# Altium PCB Main.PcbDoc
Units mil, origin at the board's own origin, x right, y up, seen from the top; angles counter-clockwise.
Board outline 3975 x 2430 mil, 2 copper layers (Top Layer, Bottom Layer); 97 components, 109 nets, 364 pads, 146 vias.
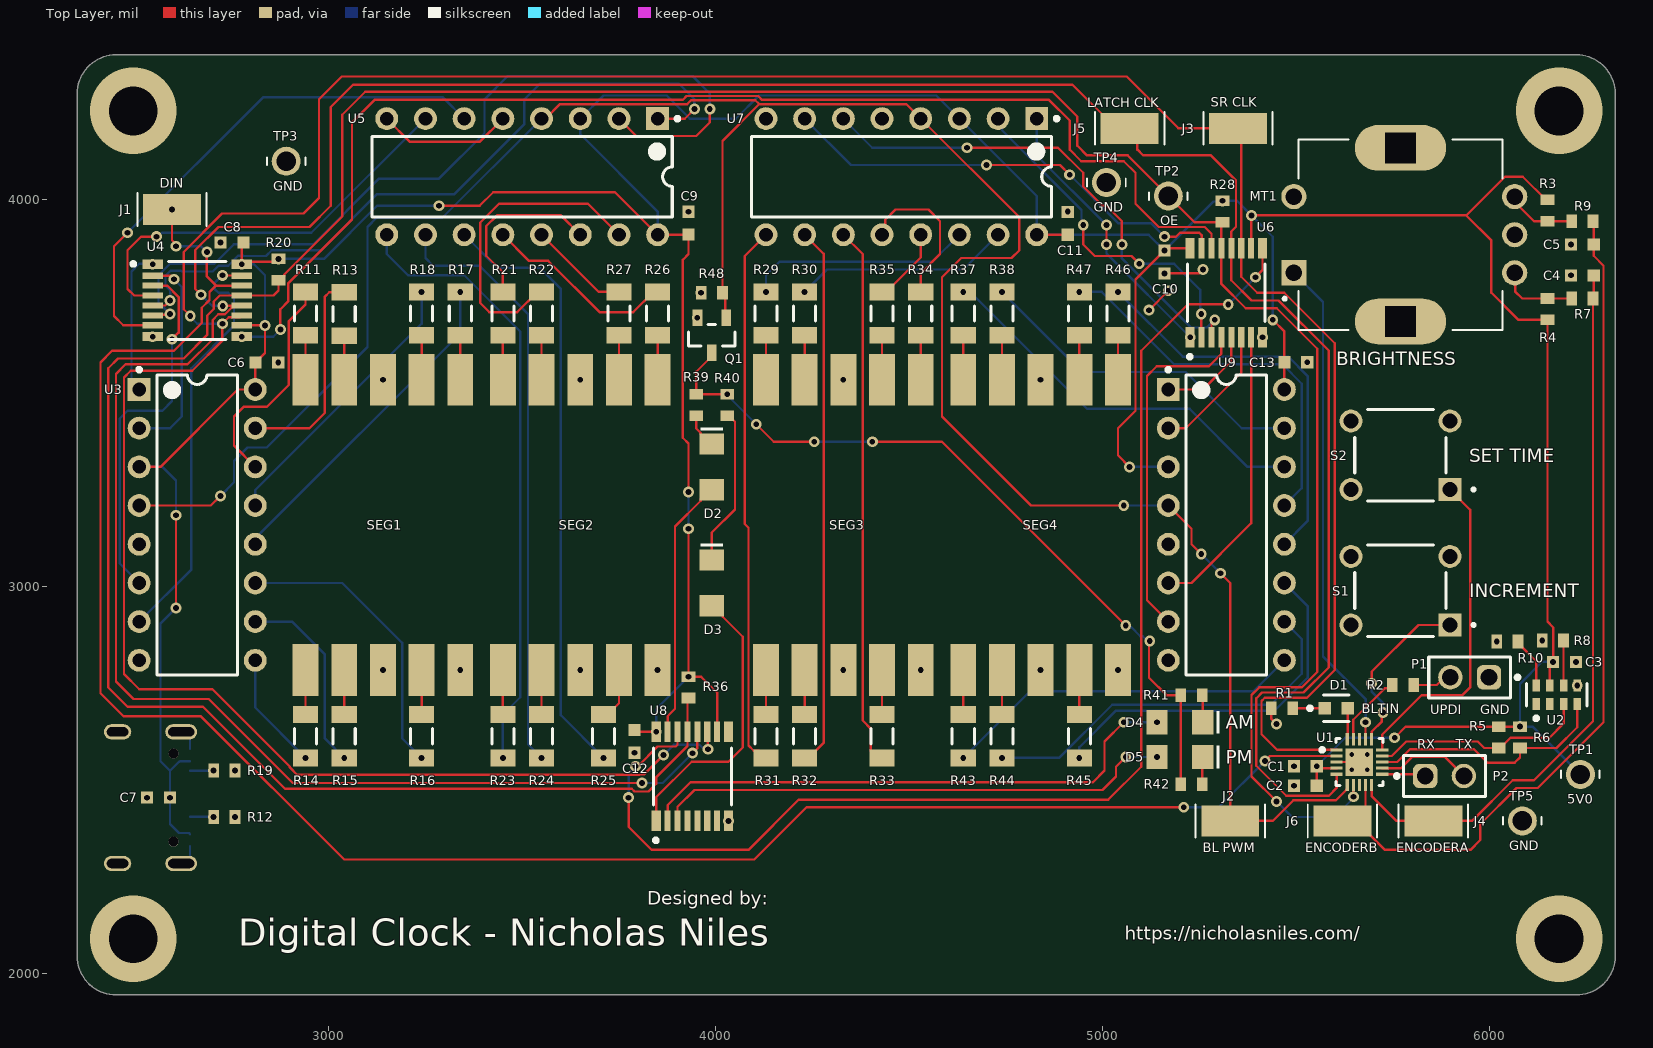
[diagram p0: Top Layer view]
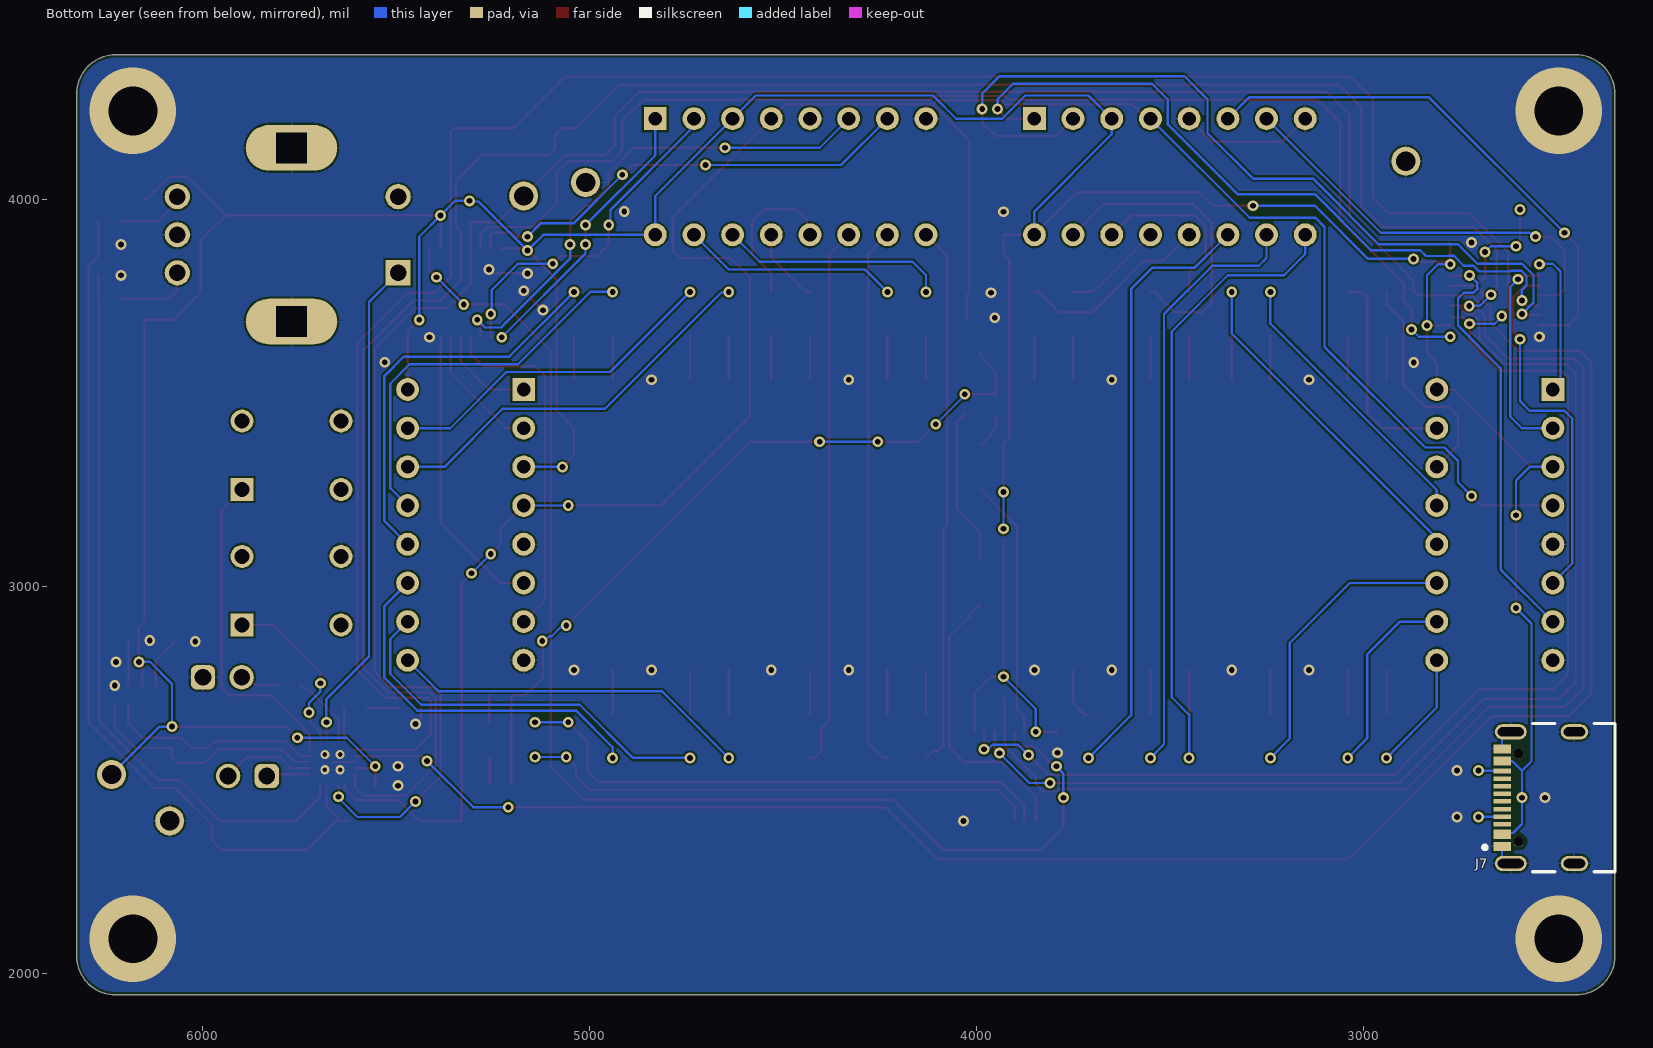
[diagram p1: Bottom Layer view, seen from below]

## Layer stack, top to bottom
Top Solder: solder mask 0.4, Solder Resist, Dk 3.5
Top Layer: signal copper 1.4
Dielectric 1: dielectric 12.6, FR-4, Dk 4.8
Bottom Layer: signal copper 1.4
Bottom Solder: solder mask 0.4, Solder Resist, Dk 3.5

## Board outline
2350,2045 2350,4275 cw(c2450,4275) 2450,4375 6225,4375 cw(c6225,4275) 6325,4275 6325,2045 cw(c6225,2045) 6225,1945 2450,1945 cw(c2450,2045)

## Design rules (kind name [scope] priority, off if disabled: settings)
BoardOutlineClearance [All] p1: gap=7.87 ignorepadtopadclearanceinfootprint=FALSE
Clearance [All] p1: gap=5 ignorepadtopadclearanceinfootprint=TRUE except(10: Arc-Hole Track-Hole SMDPad-Hole THPad-Hole Via-Hole Fill-Hole Poly-Hole Region-Hole Text-Hole)
ComponentClearance [All] p1: gap=5 collisioncheckmode=3 verticalgap=5 showdistances=TRUE
DiffPairsRouting [All] p1: maxlimit=10 minlimit=5 mostfreqgap=5 toplayer_minwidth=5 toplayer_maxwidth=1000 toplayer_prefwidth=5 bottomlayer_minwidth=5 bottomlayer_maxwidth=1000 bottomlayer_prefwidth=5 maxuncoupledlength=500
Height [All] p1: minheight=0 maxheight=71497.94 prefheight=500
HoleSize [All] p1: absolutevalues=TRUE maxlimit=248.03 minlimit=11.81 maxpercent=80.000 minpercent=20.000
HoleToHoleClearance [All] p1: gap=10 allowstackedmicrovias=FALSE
MinimumAnnularRing [All] p1: minimumring=6
MinimumSolderMaskSliver [All] p1: minsoldermaskwidth=6
PlaneClearance [All] p1: clearance=5
PlaneConnect PlaneConnectPowerPads [InPadClass('PowerPads')] p1: planeconnectstyle=Direct reliefexpansion=20 reliefentries=4 reliefconductorwidth=10 reliefairgap=10
PlaneConnect [All] p2: pad.planeconnectstyle=Relief pad.reliefexpansion=11.81 pad.reliefentries=4 pad.reliefconductorwidth=5 pad.reliefairgap=5 via.planeconnectstyle=Direct via.reliefexpansion=11.81 via.reliefentries=4 via.reliefconductorwidth=5 via.reliefairgap=5
PolygonConnect PolygonConnectPowerPads [All vs (InPadClass('PowerPads'))] p1: connectstyle=Direct reliefconductorwidth=10 reliefentries=4 polygonreliefangle="90 Angle" airgapwidth=10
PolygonConnect [All] p2: thpad.connectstyle=Relief thpad.reliefconductorwidth=5 thpad.reliefentries=4 thpad.polygonreliefangle="90 Angle" thpad.airgapwidth=5 smdpad.connectstyle=Relief smdpad.reliefconductorwidth=5 smdpad.reliefentries=4 smdpad.polygonreliefangle="90 Angle" smdpad.airgapwidth=5 via.connectstyle=Direct via.reliefconductorwidth=5 via.reliefentries=4 via.polygonreliefangle="90 Angle" via.airgapwidth=5
RoutingVias [All] p1: holewidth=11.81 width=23.62 viastyle="Through Hole" minholewidth=11.81 minwidth=23.62 maxholewidth=23.62 maxwidth=259.84
SilkToSilkClearance [All] p1: silktosilkclearance=5
SilkToSolderMaskClearance [IsPad] p1: minsilkscreentomaskgap=5 clearancetoexposedcopper=TRUE
SolderMaskExpansion [All] p1: expansion=2 istentingtop=FALSE
SupplyNets "Schematic Supply Nets_1" [InNet('5V0')] p1: voltage=0.000
SupplyNets "Schematic Supply Nets" [InNet('GND')] p2: voltage=0.000
UnRoutedNet [All] p1: checkbadconnections=TRUE
Width Width_10mil [All] p1: maxlimit=6 minlimit=6 preferedwidth=6 minimp=50.000000 maximp=50.000000 favimp=50.000000
Width Width_6mil [All] p2: maxlimit=1000 minlimit=6 preferedwidth=6 minimp=50.000000 maximp=50.000000 favimp=50.000000
Width Power_20mil [All] p3: maxlimit=1000 minlimit=20 preferedwidth=20 minimp=50.000000 maximp=50.000000 favimp=50.000000
Width Power_12mil [All] p4: maxlimit=1000 minlimit=12 preferedwidth=12 minimp=50.000000 maximp=50.000000 favimp=50.000000
Width Width_5mil [All] p5: maxlimit=1000 minlimit=5 preferedwidth=5 minimp=50.000000 maximp=50.000000 favimp=50.000000
19 further rules are at their usual default settings.

## Classes and differential pairs
component class Main: C1 C2 C3 C4 C5 C6 C9 C13 D1 D2 D3 D4 D5 J1 J2 J3 J4 J5 J6 J7 MT1 P1 P2 Q1 R1 R2 R3 R4 R5 R6 R7 R8 R9 R10 R13 R15 R17 R20 R21 R23 R24 R26 R27 R30 R32 R33 R35 R37 R38 R43 S1 S2 SEG1 SEG2 SEG3 SEG4 TP1 TP2 TP3 TP4 TP5 U1 U2 U3 U4 U5 U6 U7 U8 U9

## Components (designator, comment, footprint, x,y, rotation, side; value= is the part's Value field where it differs from the comment)
C1 "10uF" WCAP-CSGP_0603_L1.6W0.8H0.8_Reflow 5524,2536 r0 top
C2 "1uF" WCAP-CSGP_0603_L1.6W0.8H0.8_Reflow 5524,2486 r0 top
C3 "0.1µF" WCAP-CSGP_0603_L1.6W0.8H0.8_Reflow 6194,2806 r0 top
C4 "10nF" WCAP-CSGP_0603_L1.6W0.8H0.8_Reflow 6240,3805 r180 top
C5 "10nF" WCAP-CSGP_0603_L1.6W0.8H0.8_Reflow 6240,3885 r180 top
C6 "100nF" WCAP-CSGP_0603_L1.6W0.8H0.8_Reflow 2840,3580 r180 top locked
C7 "22uF" WCAP-CSGP_0603_L1.6W0.8H0.8_Reflow 2560,2455 r0 top
C8 "100nF" WCAP-CSGP_0603_L1.6W0.8H0.8_Reflow 2750,3890 r0 top locked
C9 "100nF" WCAP-CSGP_0603_L1.6W0.8H0.8_Reflow 3930,3940 r270 top locked
C10 "100nF" WCAP-CSGP_0603_L1.6W0.8H0.8_Reflow 5160,3839.53 r90 top locked
C11 "100nF" WCAP-CSGP_0603_L1.6W0.8H0.8_Reflow 4910,3939.53 r270 top locked
C12 "100nF" WCAP-CSGP_0603_L1.6W0.8H0.8_Reflow 3790,2600.47 r90 top locked
C13 "100nF" WCAP-CSGP_0603_L1.6W0.8H0.8_Reflow 5499.53,3580.47 r180 top
D1 "LTST-C190KGKT" FP-LTST-C190KGKT-MFG 5604,2686 r0 top
D2 "150120RS75000" WL-SMCW_1206_150120xx75000 3990,3310 r270 top locked
D3 "150120RS75000" WL-SMCW_1206_150120xx75000 3990,3010 r270 top locked
D4 "150120RS75000" WL-SMCW_1206_150120xx75000 5200,2650 r180 top locked
D5 "150120RS75000" WL-SMCW_1206_150120xx75000 5200,2560 r180 top locked
J1 "5019" 5019_MFG 2595,3975 r0 top
J2 "5019" 5019_MFG 5330,2395 r0 top
J3 "5019" 5019_MFG 5350,4185 r0 top
J4 "5019" 5019_MFG 5855,2395 r0 top
J5 "5019" 5019_MFG 5070,4185 r0 top
J6 "5019" 5019_MFG 5620,2395 r0 top
J7 "USB4105-GF-A" FP-USB4105-GF-A-MFG 2500,2455 r90 bottom
MT1 "PEC11R-4215F-S0024" XDCR_PEC11R-4215F-S0024 5770,3910 r90 top
P1 "61300211121" 61300211121 5949,2766 r180 top
P2 "61300211121" 61300211121 5884,2511 r0 top
Q1 "DMN2058U-13" FP-C04-17458-MFG 3990,3650 r270 top locked
R1 "1kΩ" RESC1608X55X25NL10T15 5464,2686 r0 top
R2 "1k" RESC1608X55X25NL10T15 5776.56,2746 r180 top
R3 "10k" RESC1608X55X25NL10T15 6150,3972.56 r90 top
R4 "10k" RESC1608X55X25NL10T15 6150,3717.44 r270 top
R5 "10k" RESC1608X55X25NL10T15 6024,2611 r90 top
R6 "10k" RESC1608X55X25NL10T15 6079,2611 r90 top
R7 "10k" RESC1608X55X25NL10T15 6240,3745 r0 top
R8 "10kΩ" RESC1608X55X25NL10T15 6163.88,2861 r0 top
R9 "10k" RESC1608X55X25NL10T15 6240,3945 r0 top
R10 "10kΩ" RESC1608X55X25NL10T15 6046.44,2858.44 r0 top
R11 "470Ω" RESC3216X70X50NL05T20 2940,3706.1 r90 top locked
R12 "5.1kΩ" RESC1608X55X25NL10T15 2730,2405 r180 top
R13 "470Ω" RESC3216X70X50NL05T20 3040,3705 r90 top
R14 "470Ω" RESC3216X70X50NL05T20 2940,2613.9 r270 top locked
R15 "470Ω" RESC3216X70X50NL05T20 3040,2613.9 r270 top locked
R16 "470Ω" RESC3216X70X50NL05T20 3240,2613.9 r270 top locked
R17 "470Ω" RESC3216X70X50NL05T20 3340,3706.1 r90 top locked
R18 "470Ω" RESC3216X70X50NL05T20 3240,3706.1 r90 top locked
R19 "5.1kΩ" RESC1608X55X25NL10T15 2730,2525 r180 top
R20 "10kΩ" RESC1608X55X25NL10T15 2870,3820 r270 top locked
R21 "470Ω" RESC3216X70X50NL05T20 3450,3706.1 r90 top locked
R22 "470Ω" RESC3216X70X50NL05T20 3550,3706.1 r90 top locked
R23 "470Ω" RESC3216X70X50NL05T20 3450,2613.9 r270 top locked
R24 "470Ω" RESC3216X70X50NL05T20 3550,2613.9 r270 top locked
R25 "470Ω" RESC3216X70X50NL05T20 3710,2613.9 r270 top locked
R26 "470Ω" RESC3216X70X50NL05T20 3850,3706.1 r90 top locked
R27 "470Ω" RESC3216X70X50NL05T20 3750,3706.1 r90 top locked
R28 "10kΩ" RESC1608X55X25NL10T15 5310,3970 r270 top locked
R29 "470Ω" RESC3216X70X50NL05T20 4130,3706.1 r90 top locked
R30 "470Ω" RESC3216X70X50NL05T20 4230,3706.1 r90 top locked
R31 "470Ω" RESC3216X70X50NL05T20 4130,2613.9 r270 top locked
R32 "470Ω" RESC3216X70X50NL05T20 4230,2613.9 r270 top locked
R33 "470Ω" RESC3216X70X50NL05T20 4430,2613.9 r270 top locked
R34 "470Ω" RESC3216X70X50NL05T20 4530,3706.1 r90 top locked
R35 "470Ω" RESC3216X70X50NL05T20 4430,3706.1 r90 top locked
R36 "10kΩ" RESC1608X55X25NL10T15 3930,2740 r270 top locked
R37 "470Ω" RESC3216X70X50NL05T20 4640,3706.1 r90 top locked
R38 "470Ω" RESC3216X70X50NL05T20 4740,3706.1 r90 top locked
R39 "1kΩ" RESC1608X55X25NL10T15 3950,3470 r270 top locked
R40 "1kΩ" RESC1608X55X25NL10T15 4030,3470 r270 top locked
R41 "1kΩ" RESC1608X55X25NL10T15 5230,2720 r0 top locked
R42 "1kΩ" RESC1608X55X25NL10T15 5230,2490 r0 top locked
R43 "470Ω" RESC3216X70X50NL05T20 4640,2613.9 r270 top locked
R44 "470Ω" RESC3216X70X50NL05T20 4740,2613.9 r270 top locked
R45 "470Ω" RESC3216X70X50NL05T20 4940,2613.9 r270 top locked
R46 "470Ω" RESC3216X70X50NL05T20 5040,3706.1 r90 top locked
R47 "470Ω" RESC3216X70X50NL05T20 4940,3706.1 r90 top locked
R48 "10kΩ" RESC1608X55X25NL10T15 3990,3760 r0 top locked
S1 "SWT0325-073016TSK_REVA" SW_SWT0325-073016TSK_REVA 5770,2990 r180 top
S2 "SWT0325-073016TSK_REVA" SW_SWT0325-073016TSK_REVA 5770,3340 r180 top
SEG1 "ACSC56-41SEKWA" ACSC56-41SEKWA 3140,3160 r0 top locked
SEG2 "ACSC56-41SEKWA" ACSC56-41SEKWA 3650,3160 r0 top locked
SEG3 "ACSC56-41SEKWA" ACSC56-41SEKWA 4330,3160 r0 top locked
SEG4 "ACSC56-41SEKWA" ACSC56-41SEKWA 4840,3160 r0 top locked
TP1 "1035" KEYSTONE_1035 6235,2515 r0 top
TP2 "1035" KEYSTONE_1035 5170,4010 r0 top
TP3 "1035" KEYSTONE_1035 2890,4100 r0 top
TP4 "1035" KEYSTONE_1035 5010,4045 r0 top
TP5 "1035" KEYSTONE_1035 6085,2395 r0 top
U1 "ATTINY1616-MFR" FP-C04-21380-MFG 5664,2546.94 r0 top
U2 "RV-3028-C7 32.768kHz 1ppm TA QC" FP-RV-3028-C7_32_768kHz_1-MFG 6174,2721 r0 top
U3 "CD74HCT4511E" N0016A 2660,3160 r0 top locked
U4 "74HC595PW,118" FP-SOT403-1-MFG 2660,3740 r0 top locked
U5 "CD74HCT4511E" N0016A 3500,4060 r270 top locked
U6 "74HC595PW,118" FP-SOT403-1-MFG 5320,3760 r90 top locked
U7 "CD74HCT4511E" N0016A 4480,4060 r270 top locked
U8 "74HC595PW,118" FP-SOT403-1-MFG 3940,2510 r90 top locked
U9 "CD74HCT4511E" N0016A 5320,3160 r0 top locked

## Footprints (in the part's own frame and the unit in brackets; to place one, negate y for a bottom-side part, rotate by r counter-clockwise, add the part's x,y. Pads: shape width x height; smd on the part's side, far side on the other; paste and mask are expansions set on the pad)
5019_MFG [mm] "Recommended Land Pattern"
  rect 3.8x2.03 smd paste+0 mask+0: 1(0,0)
  silkscreen extent -2.27,-1.08 2.27,1.08, body extent -1.91,-1.01 1.91,1.01, height 2.42
61300211121 [mm] "Pin Header, pitch 2.54 mm, THT, Vertical, single row, 2p"
  rrect50% 1.6x1.6 hole 1.1: 1(-1.27,0)
  round 1.6 hole 1.1: 2(1.27,0)
  silkscreen extent -3.26,-1.35 2.69,1.35, body extent -2.54,-1.27 2.54,1.27, height 8.57
ACSC56-41SEKWA [mm]
  rect 1.7x3.4 / inner round 0 / far side round 0 all layers, no hole: 1(-5.08,-9.525) 2(-2.54,-9.525) 3(0,-9.525) 4(2.54,-9.525) 5(5.08,-9.525) 6(5.08,9.525) 7(2.54,9.525) 8(0,9.525) 9(-2.54,9.525) 10(-5.08,9.525)
  body extent -6.2,-9.5 6.2,9.5, height 3.75
FP-C04-17458-MFG [mm]
  rect 1.1x0.65 smd paste+0 mask+0: 1(-1.15,0.95) 2(-1.15,-0.95) 3(1.15,0)
  silkscreen extent -0.7,-1.52 0.7,1.52, body extent -1.8,-1.62 1.8,1.62, height 0.25
FP-C04-21380-MFG [mm]
  rect 0.8x0.2 smd paste+0 mask+0: 1(-1.5,0.8) 2(-1.5,0.4) 3(-1.5,0) 4(-1.5,-0.4) 5(-1.5,-0.8) 11(1.5,-0.8) 12(1.5,-0.4) 13(1.5,0) 14(1.5,0.4) 15(1.5,0.8)
  rect 0.2x0.8 smd paste+0 mask+0: 6(-0.8,-1.5) 7(-0.4,-1.5) 8(0,-1.5) 9(0.4,-1.5) 10(0.8,-1.5) 16(0.8,1.5) 17(0.4,1.5) 18(0,1.5) 19(-0.4,1.5) 20(-0.8,1.5)
  rect 1.8x1.8 smd paste+0 mask+0: 21(0,0)
  silkscreen extent -2.57,-1.55 1.55,1.55, body extent -2,-2 2,2, height 0.25
FP-LTST-C190KGKT-MFG [mm]
  rect 0.8x0.8 smd paste+0 mask+0: 1(-0.75,0) 2(0.75,0)
  silkscreen extent -1.85,-0.87 0.85,0.87, body extent -1.25,-0.55 1.25,0.55, height 0.25
FP-RV-3028-C7_32_768kHz_1-MFG [mm]
  rect 0.5x0.8 smd paste+0 mask+0: 1(-1.35,-0.6) 2(-0.45,-0.6) 3(0.45,-0.6) 4(1.35,-0.6) 5(1.35,0.6) 6(0.45,0.6) 7(-0.45,0.6) 8(-1.35,0.6)
  silkscreen extent -1.97,-1.67 1.97,0.75, body extent -1.7,-1.1 1.7,1.1, height 0.25
FP-SOT403-1-MFG [mm]
  rect 1.35x0.6 smd paste-1000 mask+0: 1(-2.925,2.375) 8(-2.925,-2.375) 9(2.925,-2.375) 16(2.925,2.375)
  rect 1.35x0.4 smd paste-1000 mask+0: 2(-2.925,1.625) 3(-2.925,0.975) 4(-2.925,0.325) 5(-2.925,-0.325) 6(-2.925,-0.975) 7(-2.925,-1.625) 10(2.925,-1.625) 11(2.925,-0.975) 12(2.925,-0.325) 13(2.925,0.325) 14(2.925,0.975) 15(2.925,1.625)
  silkscreen extent -4.32,-2.55 1.88,2.55, body extent -3.72,-2.9 3.72,2.9, height 0.25
FP-USB4105-GF-A-MFG [mm]
  rrect100% 1x2.1 hole 1.7 slot 0.6 at 0 deg paste-2539.97 mask+0: 1(-4.32,3.015) 2(4.32,3.015)
  rrect100% 1x1.8 hole 1.4 slot 0.6 at 0 deg paste-2539.97 mask+0: 3(-4.32,-1.165) 4(4.32,-1.165)
  rect 0.6x1.15 smd paste+0 mask+0: A1-B12(-3.2,3.59) A4-B9(-2.4,3.59) B1-A12(3.2,3.59) B4-A9(2.4,3.59)
  rect 0.3x1.15 smd paste+0 mask+0: A5(-1.25,3.59) A6(-0.25,3.59) A7(0.25,3.59) A8(1.25,3.59) B5(1.75,3.59) B6(0.75,3.59) B7(-0.75,3.59) B8(-1.75,3.59)
  round 0.65 hole 0.65 unplated paste-2539.97 mask+0: ""(-2.89,2.515) ""(2.89,2.515)
  silkscreen extent -4.86,-3.84 4.86,4.84, body extent -4.79,-3.76 4.79,3.77, height 3.26
KEYSTONE_1035 [mil]
  round 75 hole 50: TP(0,0)
  silkscreen extent -50,-10 50,10, body extent -50,-12 50,8, height 220
N0016A [mm] "DIP, 16-Leads, Body 19.7x6.6mm, Pitch 2.54mm"
  rect 1.5x1.5 hole 0.9: 1(-3.81,8.89)
  round 1.5 hole 0.9: 2(-3.81,6.35) 3(-3.81,3.81) 4(-3.81,1.27) 5(-3.81,-1.27) 6(-3.81,-3.81) 7(-3.81,-6.35) 8(-3.81,-8.89) 9(3.81,-8.89) 10(3.81,-6.35) 11(3.81,-3.81) 12(3.81,-1.27) 13(3.81,1.27) 14(3.81,3.81) 15(3.81,6.35) 16(3.81,8.89)
  silkscreen extent -3.93,-9.85 2.65,10.31, body extent -3.95,-9.85 3.95,9.85, height 5.08
RESC1608X55X25NL10T15 [mm] "Chip Resistor, 2-Leads, Body 1.60x0.80mm, IPC Medium Density"
  rect 0.7x0.9 smd: 1(-0.7,0) 2(0.7,0)
  body extent -0.85,-0.45 0.85,0.45, height 0.55
RESC3216X70X50NL05T20 [mm] "Chip Resistor, 2-Leads, Body 3.20x1.60mm, IPC Medium Density"
  rect 1.1x1.65 smd: 1(-1.425,0) 2(1.425,0)
  silkscreen extent -0.5,-0.72 0.5,0.72, body extent -1.63,-0.82 1.62,0.82, height 0.7
SW_SWT0325-073016TSK_REVA [mm]
  rect 1.508x1.508 / inner round 1.508 / far side rect 1.508x1.508 hole 1 mask+0.102: 1(-3.25,2.25)
  round 1.508 hole 1 mask+0.102: 2(3.25,2.25) 3(-3.25,-2.25) 4(3.25,-2.25)
  silkscreen extent -4.9,-3 3,3, body extent -3.95,-3 3.95,3, height 7.3
WCAP-CSGP_0603_L1.6W0.8H0.8_Reflow [mm] "Ceramic Capacitors, body 1.6x0.8mm"
  rect 0.8x0.8 smd: 1(-0.75,0) 2(0.75,0)
  body extent -0.8,-0.4 0.8,0.4, height 0.8
WL-SMCW_1206_150120xx75000 [mm] "SMD Mono-color Chip LED, body 3.2x1.6mm"
  rect 1.4x1.6 smd: 1(-1.5,0) 2(1.5,0)
  silkscreen extent -2.6,-0.75 -2.4,0.75, body extent -1.6,-0.8 1.6,0.8, height 0.68
XDCR_PEC11R-4215F-S0024 [mm]
  rect 1.65x1.65 hole 1.1: 1(-2.5,7)
  round 1.65 hole 1.1: 2(2.5,7) A(-2.5,-7.5) B(2.5,-7.5) COM(0,-7.5)
  oval 3x6 hole 2 square: S1(-5.7,0) S2(5.7,0)
  silkscreen extent -6.25,-6.7 6.25,7.7, body extent -6.93,-7.6 6.93,7.1, height 21.53

## Part data
C1 C2 C3 C4 C5 C6 C7 C8 C9 C10 C11 C12 C13: library part CMP-207839-000060-3, "10V tolerance"
D1: library part CMP-2000-05197-2, "LED GREEN CLEAR CHIP SMD", Case Code (Imperial)=0603, Case Code (Metric)=1608, Color=Green, Forward Current=30mA, Forward Voltage=2V, Lens Color=Colorless, Max Operating Temperature=85°C, Min Operating Temperature=-55°C, Package Quantity=1, Power Dissipation=75mW, Reverse Voltage=5V, Test Current=20mA, Case/Package=0603, Depth=0.8mm, Dominant Wavelength=571nm, Height=0.8mm, Illumination Color=Green, Lead Free="Lead Free", Length=1.6mm, Lens Style=Diffused, Lens Transparency=Clear, Luminous Intensity=35mcd, Mount="Surface Mount", Number of Elements=1, Number of LEDs=1, Number of Pins=2, Packaging="Tape and Reel", Power Rating=75mW, Radiation Hardening=No, Viewing Angle=130°, Wavelength=574nm, Width=0.8mm
D2 D3 D4 D5: library part CMP-1426-00013-4, "WL-SMCW SMT Mono-Color Chip LED Waterclear", Case Code (Imperial)=1206, Case Code (Metric)=3216, Color=Red, Forward Current=100mA, Forward Voltage=2V, Max Junction Temperature (Tj)=95°C, Max Operating Temperature=85°C, Max Reverse Voltage (DC)=5V, Min Operating Temperature=-40°C, Power Dissipation=72mW, Test Current=20mA, Case/Package=1206, Dominant Wavelength=625nm, Height=680µm, Length=3.2mm, Lens Style="Clear, Rectangular", Luminous Intensity=150mcd, Mount="Surface Mount", Packaging="Tape and Reel", Peak Wavelength=630nm, REACH SVHC=Unknown, Reverse Voltage=5V, RoHS=Compliant, Viewing Angle=140°, Wavelength=625nm, Width=1.6mm
J1 J2 J3 J4 J5 J6: library part CMP-1672-00008-3, "Phosphor Bronze Contact Miniature Silver Plated Surface Mount Test Points", China RoHS=Compliant, ComponentLink1Description="Manufacturer's Website", ComponentLink1URL=http://www.keyelco.com/, ComponentLink2Description="Datasheet URL", ComponentLink2URL=https://www.keyelco.com/product-pdf.cfm?p=1357, Contact Material=Silver, Contact Plating=Silver, Height=2.42mm, HelpURL=https://www.keyelco.com/product-pdf.cfm?p=1357, Lead Free="Lead Free", Lifecycle Status=Production, Material=Bronze, Mount="Surface Mount", Number of Contacts=1, Number of Pins=1, Packaging="Tape and Reel", REACH SVHC=Yes, RoHS=Compliant, Termination=SMD/SMT
J7: library part CMP-245163-000001-1, "CONN RCPT USB2.0 TYPEC 5A", Current Rating=5/6.25/1.25/0.25A, Manufacturer=GCT, Package=0, Temperature="-40°C to +85°C", Temperature Range High=+85°C, Temperature Range Low=-40°C, Voltage Rating=20V, Automotive=No, Category=Conn, ComponentLink2Description=Datasheet, ComponentLink2URL=https://gct.co/files/drawings/usb4105.pdf, Conn Orientation="Right Angle", Contact Material=Gold,Nickel, Device Class L1=Connectors, Device Class L2="USB Connectors", Device Class L3=unset, Digikey Description="CONN RCPT USB2.0 TYPEC 5A", Height=3.46mm, Is Female=yes, Lead Free=Yes, Manufacturer Part Number=USB4105-GF-A, Number of Contacts=16, Octopart=https://octopart.com/usb4105-gf-a-gct-106627878, RoHS=TRUE, Usb Standard="USB 2.0"
MT1: "Incremental Encoder, 12 Mm, Contact Rating 10 Ma - 5 Vdc", Package=None, Availability=Unavailable, MP=PEC11R-4215F-S0024, Price=None
P1: library part CMP-1712-00002-7, "THT Vertical Pin Header WR-PHD, Pitch 2.54 mm, Single Row, 2 pins", Color=Black, Contact Resistance=20mΩ, Current Rating=3A, Max Operating Temperature=105°C, Min Operating Temperature=-40°C, Operating Supply Voltage=250V, Connector Type="Male Pin", Contact Gender=Male, Contact Material=Gold, Contact Mating Length=5.9944mm, Contact Plating=Gold, Gender=Male, Height=8.94mm, Housing Material=PBT, Lead Free="Lead Free", Lead Pitch=2.54mm, Mount="Through Hole", Number of Contacts=2, Number of Pins=2, Number of Positions=2, Number of Rows=1, Orientation=Vertical, Packaging=Bulk, Pitch=2.54mm, REACH SVHC=No, RoHS=Compliant, Termination="Through Hole", Voltage Rating=250V
P2: library part CMP-1712-00002-6, Color=Black, Contact Resistance=20mΩ, Current Rating=3A, Max Operating Temperature=125°C, Min Operating Temperature=-40°C, Operating Supply Voltage=250V, Connector Type="Male Pin", Contact Gender=Male, Contact Material=Copper, Contact Mating Length=5.9944mm, Contact Plating=Gold, Gender=Male, Height=8.94mm, Housing Material=PBT, Lead Free="Lead Free", Lead Pitch=2.54mm, Mount="Through Hole", NexarPartId=20081794, Number of Contacts=2, Number of Pins=2, Number of Positions=2, Number of Rows=1, Orientation=Vertical, Packaging=Bulk, Pitch=2.54mm, REACH SVHC="No SVHC", RoHS=Compliant, Termination="Through Hole", Voltage Rating=250V
Q1: library part CMP-00252-47153607-1, "TN2130K1-G Mosfet, N-Channel Enhancement-Mode, 300V, 25 Ohm Rohs Compliant: Yes", Case/Package=SOT-23, Continuous Drain Current (ID)=85mA, Drain to Source Breakdown Voltage=300V, Drain to Source Resistance=25Ω, Gate to Source Voltage (Vgs)=20V, Input Capacitance=50pF, Max Operating Temperature=150°C, Max Power Dissipation=360mW, Min Operating Temperature=-55°C, Drain to Source Voltage (Vdss)=300V, Element Configuration=Single, Fall Time=7ns, Height=950µm, Lead Free="Lead Free", Length=2.9mm, Lifecycle Status=Production, Mount="Surface Mount", NexarPartId=47153607, Number of Channels=1, Number of Elements=1, Number of Pins=3, Power Dissipation=360mW, Radiation Hardening=No, Rds On Max=25Ω, Rise Time=7ns, RoHS=Compliant, Schedule B="8541210080, 8541210080", Turn-Off Delay Time=12ns, Turn-On Delay Time=10ns, Weight=1.437803g, Width=1.3mm
R1 R2 R3 R4 R5 R6 R7 R8 R9 R10 R12 R19 R20 R28 R36 R39 R40 R41 R42 R48: library part CMP-2000-04186-1
R11 R13 R14 R15 R16 R17 R18 R21 R22 R23 R24 R25 R26 R27 R29 R30 R31 R32 R33 R34 R35 R37 R38 R43 R44 R45 R46 R47: library part CMP-2003-00307-1, Manufacturer=Panasonic, Part Number=ERJ8ENF3300V
S1 S2: "6mm x 6mm Through Hole Tactile Switch", Package=None, Check_prices=https://www.snapeda.com/parts/SWT0325-073016TSK/Global+Connector+Technology/view-part/?ref=eda, MF="Global Connector Technology", MP=SWT0325-073016TSK, SnapEDA_Link=https://www.snapeda.com/parts/SWT0325-073016TSK/Global+Connector+Technology/view-part/?ref=snap
SEG1 SEG2 SEG3 SEG4: "SMD 7-Segment Display"
TP1 TP2 TP3 TP4 TP5: "Test Point PC Slotted THM Height .335 Brass/Tin", Package=None, Check_prices=https://www.snapeda.com/parts/1035/Keystone/view-part/?ref=eda, MF="Keystone Electronics", MP=1035, SnapEDA_Link=https://www.snapeda.com/parts/1035/Keystone/view-part/?ref=snap
U1: library part CMP-06276-000228-1, "IC MCU 8BIT 16KB FLASH 20VQFN", Case/Package=VQFN, Frequency=20MHz, Max Operating Temperature=125°C, Min Operating Temperature=-40°C, Core Architecture=AVR, Interface=I2C, Memory Size=16KB, Memory Type=FLASH, Number of I/Os=18, Oscillator Type=Internal, Packaging="Cut Tape", Peripherals="Brown-out Detect/Reset", RoHS Compliant=Yes
U2: library part CMP-226158-000001-1, "Real Time Clock Serial 2byte Clock/Calendar/Alarm/Timer/Battery Backup 8-Pin CSMD T/R", Ambient Temperature Range High=+85°C, Ambient Temperature Range Low=-40°C, Frequency=32.768kHz, Manufacturer="Micro Crystal", Max Supply Voltage=5.5V, Min Supply Voltage=1.1V, Nominal Supply Current=0.04uA, Temperature="-40°C to +85°C", Automotive=No, Category=IC, ComponentLink2Description=Datasheet, ComponentLink2URL=https://www.microcrystal.com/fileadmin/Media/Products/RTC/Datasheet/RV-3028-C7.pdf, Device Class L1="Integrated Circuits (ICs)", Device Class L2="Clock and Timing", Device Class L3="Real Time Clocks", Height=0.8mm, Interface=I2C, Lead Free=Yes, Manufacturer Part Number="RV-3028-C7 32.768kHz 1ppm TA QC", Memory Size=2Bytes, Mouser Description="RV-3028-C7 32.768KHZ 1PPM Ta Qc", Number Of Outputs=1, Octopart=https://octopart.com/rv-3028-c7+32.768khz+1ppm+ta+qc-micro+crystal-98880451, Package="RV-3028-C7 32.768kHz 1ppm TA QC", RoHS=TRUE, Temperature Range High=+85°C, Temperature Range Low=-40°C
U3 U5 U7 U9: library part CMP-0388-00318-2, "High Speed CMOS Logic BCD-to-7-Segment Latch / Decoder / Driver, 4.5 to 5.5 V, -55 to 125 degC, 16-pin DIP (N16), Pb-Free (RoHS)", Manufacturer="Texas Instruments", Rating=Catalog, Code_JEDEC=MS-001, ComponentLink1Description="Manufacturer URL", ComponentLink1URL=http://www.ti.com/, ComponentLink2Description=Datasheet, ComponentLink2URL=http://www.ti.com/general/docs/lit/getliterature.tsp?genericPartNumber=CD74HCT4511&fileType=pdf, ComponentLink3Description="Package Specification", ComponentLink3URL=http://www.ti.com/litv/pdf/mpdi002c, DatasheetVersion=SCHS279D, Eco-Plan="Pb-Free (RoHS)", Mounting Technology="Through Hole", PackageDescription="16-Pin Plastic In-Line, Body 19.305 x 6.35 mm, Pitch 2.54 mm", PackageReference=N0016A, PackageVersion=4040049/E, PartNumber=CD74HCT4511E, SubFamily="Discrete Segment LED Driver", Vin(Max)(V)=5.5, Vin(Min)(V)=4.5
U4 U6 U8: library part CMP-14351-000004-1, "IC SHIFT REGISTER 8BIT 16TSSOP"

## Via types
v1: diameter 28, hole 15, Top Layer to Bottom Layer, tented both sides, 138 vias
v2: diameter 223.62/223.62 (per signal layer), hole 125.98, Top Layer to Bottom Layer, 4 vias
v3: diameter 23.62, hole 11.81, Top Layer to Bottom Layer, 4 vias

## Nets (pads, with @x,y where several pads share a name; then routed paths per layer and width w, separated by ;. In a path a pad name is that pad's centre, name@x,y a point inside that pad or via, vN(x,y) a via of type N, cw(c..) or ccw(c..) an arc to the next point about the centre after c; other vN are vias at no path point)
5V0: C1.2 C2.2 C3.1 C6.2 C7.2 C8.2 C9.2 C10.2 C11.2 C12.2 C13.2 J7.A4-B9 J7.B4-A9 R3.2 R4.2 R5.2 R6.2 R20.1 R28.1 R36.1 TP1.TP U1.4 U2.7 U3.3 U3.16 U4.10 U4.16 U5.3 U5.16 U6.10 U6.16 U7.3 U7.16 U8.10 U8.16 U9.3 U9.16 | length 12098.8
  Top Layer w6: U3.3 2565,3310 2765,3510 U3.16 2810,3579.53 C6.2 2835,3604.53 v1(2835,3675) 2833.98,3676.02 U4.10 ; v1(2605,2945) v1(2605,3185) ; C8.2 2775.16,3885.63 v1(2775.16,3833.5) 2781.65,3840 2862.44,3840 v1(2870,3847.56) ; v1(3285,3985) 3390,3985 3425,4020 3740,4020 U5.16 3929.53,3910 3930,3909.53 3930,3860 3915,3845 3915,3385.48 3930,3370.48 v1(3930,3245) ; C12.2 3794.84,2625.16 v1(3846.5,2625.16) ; v1(3930,3150) v1(3930,2767.56) 3962.44,2767.56 4003.98,2726.02 U8.10 ; U7.16 C11.2 ; v1(5070,3310) 5040,3340 5040,3410 5085,3455 5085,3794.06 v1(5160,3869.06) 5166.1,3875.16 U6.16 ; U6.10 5384.49,3875.67 5384.49,3959.49 v1(5385,3960) 5940,3960 ; v1(5440,3690) 5470,3660 C13.2 U9.16 ; C2.2 v1(5553.53,2536) 5558.33,2531.2 U1.4 ; v1(5755,2610) 5783.56,2638.56 R5.2 v1(6079,2638.56) ; R3.2 6146.06,4000.12 6086.18,4060 6040,4060 5940,3960 ; U2.7 6156.28,2797.81 6165,2806.53 6165,2895 6150,2910 R4.2 6075.12,3689.88 6005,3760 6005,3895 5940,3960
  Bottom Layer w6: U3.3 2570,3310 2605,3275 v1(2605,3185) ; v1(2605,2945) 2565,2905 2565,2549.05 2589.53,2524.53 ; J7.A4-B9 2638.41,2363.44 2613.22,2363.44 2589.53,2387.12 v1(2589.53,2455) 2589.53,2524.53 ; J7.B4-A9 2616.14,2549.49 cw(c2599.02,2568.78) 2610.87,2545.87 2589.53,2524.53 ; v1(2775.16,3833.5) 2806.5,3833.5 2835,3805 v1(2835,3675) ; v1(2870,3847.56) 2987.56,3847.56 3125,3985 v1(3285,3985) ; v1(3846.5,2625.16) 3846.5,2684.06 v1(3930,2767.56) ; U5.16 3850,3970 3650,4170 U5.3 3710,4270 3873.41,4270 3933.41,4210 4051.7,4210 4111.7,4270 4570,4270 U7.3 4830,4010 U7.16 5119.06,3910 v1(5160,3869.06) 5287,3996.06 5308.5,3996.06 v1(5310,3997.56) 5347.44,3997.56 v1(5385,3960) 5440,3905 v1(5440,3690) ; v1(3930,3150) v1(3930,3245) ; v1(5070,3310) U9.3 ; v1(5553.53,2536) 5627.53,2610 v1(5755,2610) ; v1(6164.47,2806) 6136,2806 6079,2749 v1(6079,2638.56) 6111.44,2638.56 TP1.TP
AMIndicator: D4.2 U8.2 | length 1438.7
  Top Layer w6: U8.2 3876.02,2436.02 3935,2495 4975,2495 5005,2525 5005,2600 v1(5055,2650)
  Bottom Layer w6: v1(5055,2650) v1(5140.94,2650)
BL_PWM: J2.1 Q1.1 R48.2 U1.6 U3.4 U5.4 U7.4 U9.4 | length 6227.1
  Top Layer w6: U3.4 2695,3210 v1(2720,3235) ; U5.4 3560,4210 3597.53,4247.53 3926.41,4247.53 3936.33,4257.45 4102.61,4257.45 4112.53,4247.53 ; Q1.1 4024.72,3697.96 4024.72,3752.84 R48.2 4017.56,4152.56 4112.53,4247.53 ; v1(5055,3210) 4815,3210 4585,3440 4585,3800 4635,3850 4765,3850 4785,3870 4785,3955 U7.4 4492.47,4247.53 4112.53,4247.53 ; U9.4 5230,3150 5230,3110 v1(5255,3085) ; v1(5305,3035) 5330,3010 J2.1 5440,2395 5493.3,2448.3 5603.3,2448.3 5630.14,2475.14 5631.57,2475.14 5632.5,2476.08 U1.6
  Bottom Layer w6: v1(2720,3235) 2755,3270 2755,3325 2790,3360 2840,3360 3100,3620 3100,3930 3123.61,3953.61 3293.61,3953.61 U5.4 ; v1(5055,3210) U9.4 ; v1(5255,3085) v1(5305,3035)
BUILTIN: D1.2 U1.20 | length 80.4
  Top Layer w6: U1.20 5632.5,2617.81 5633.53,2618.83 D1.2
CenterDotLED1: D2.2 U8.15 | length 675.3
  Top Layer w6: U8.15 3876.02,2666.02 3895,2685 3895,3155.94 3961.5,3222.45 3961.5,3226.39 3986.06,3250.94 D2.2
CenterDotLED2: D3.2 U8.1 | length 739.8
  Top Layer w6: U8.1 3846.5,2456.5 3938,2548 4033,2548 4070,2585 4070,2870.94 4018.5,2922.45 4018.5,2926.39 3993.94,2950.94 D3.2
CLK: J3.1 U1.1 U4.11 U6.11 U8.11 | length 8310.2
  Top Layer w6: v1(2642,3700) 2642,3700.53 2625,3717.53 2625,3865.56 2724.44,3965 2935,3965 2975,4005 2975,4260 3033.76,4318.76 5062.31,4318.76 5196.08,4185 J3.1 5358.39,4176.61 U6.11 5358.39,3801.61 5400,3760 5469.63,3760 5600,3629.63 5600,2785 5528.41,2713.41 5419.41,2713.41 5411,2705 5411,2619 5451.56,2578.44 U1.1 ; U4.11 2770.28,3696.74 2741.74,3696.74 v1(2725,3680) 2725,3636.62 2646.96,3558.58 2488.21,3558.58 2470.75,3541.12 2470.75,2774.25 2510,2735 2699.52,2735 2899.52,2535 2899.52,2532.83 2918.15,2514.2 3802.2,2514.2 3803.01,2515 3815,2515 v1(3865,2565) ; U8.11 3979.19,2624.35 3979.19,2580.81 v1(3980,2580)
  Bottom Layer w6: v1(2642,3700) 2642,3698 2660,3680 v1(2725,3680) ; v1(3865,2565) 3892,2592 3958,2592 3965.79,2584.21 3975.79,2584.21 v1(3980,2580)
DIN: J1.1 U1.2 U4.14 | length 5103
  Top Layer w6: v1(2595,3975) 2595,3895.95 2605,3885.95 v1(2605,3880) ; v1(2685,3865) 2685,3802.11 2708.72,3778.39 ; U4.14 2708.72,3778.39 ; v1(5210,2430) 4235,2430 4100,2295 3040,2295 2670,2665 2470,2665 2410,2725 2410,3580 2440,3610 2600,3610 2672,3682 2672,3720.97 2692,3740.97 2692,3761.66 2708.72,3778.39 ; v1(5420,2550) 5432.69,2562.69 U1.2
  Bottom Layer w6: v1(2605,3880) 2670,3880 v1(2685,3865) ; v1(5210,2430) 5300,2430 v1(5420,2550)
ENCODERA: C4.1 J4.1 R7.2 U1.10 | length 1887.1
  Top Layer w6: U1.10 5695.5,2459.5 5760,2395 J4.1 5955,2395 6060,2500 6115,2500 6267.56,2652.56 R7.2 6269.53,3746.97 C4.1
ENCODERB: C5.1 J6.1 R9.2 U1.9 | length 2281.3
  Top Layer w6: J6.1 5654.84,2395 5729.84,2320 5950.91,2320 5976.28,2345.38 5976.28,2386.28 6070,2480 6125,2480 6295,2650 6295,3830 6269.53,3855.47 C5.1 6269.53,3943.03 R9.2 ; J6.1@5642.79,2395 5679.75,2431.96 U1.9
EVI: R10.2 U2.8 | length 133.2
  Top Layer w6: R10.2 6074,2854.5 6120.85,2807.65 U2.8
GND: C1.1 C2.1 C3.2 C4.2 C5.2 C6.1 C7.1 C8.1 C9.1 C10.1 C11.1 C12.1 C13.1 J7.1 J7.2 J7.3 J7.4 J7.A1-B12 J7.B1-A12 MT1.2 MT1.COM MT1.S1 MT1.S2 P1.1 Q1.2 R1.1 R8.1 R10.1 R12.1 R19.1 R48.1 S1.4 S2.4 SEG1.3 SEG1.5 SEG1.8 SEG2.3 SEG2.5 SEG2.8 SEG3.3 SEG3.5 SEG3.8 SEG4.3 SEG4.5 SEG4.8 TP3.TP TP4.TP TP5.TP U1.3 U1.21 U2.5 U3.5 U3.8 U4.8 U5.5 U5.8 U6.8 U7.5 U7.8 U8.8 U9.5 U9.8 | length 745.6
  Top Layer w6: U5.8 3210,4150 3390,4150 U5.5 ; v1(5120,3715) v1(5170,3765) ; v1(5160,3810) 5250,3810 v1(5260,3820) ; R1.1 5436.44,2658.56 v1(5450,2645) ; U1.3 U1.21
  Bottom Layer w6: J7.1 2625.92,2284.92 2641.34,2300.34 J7.A1-B12 ; J7.2 2625.92,2625.08 2641.34,2609.66 J7.B1-A12
  other v1: 4033.5,2394.84 2757.56,2405 2530.47,2455 5494.47,2486 2757.56,2525 5494.47,2536 3790,2570.94 6227.15,2744.62 3140,2785 3340,2785 3650,2785 3850,2785 4330,2785 4530,2785 4840,2785 5040,2785 6223.53,2806 6018.88,2858.44 6136.32,2861 3140,3535 3650,3535 4330,3535 4840,3535 2869.53,3580 5529.06,3580.47 5413.5,3644.84 2544.84,3646.5 3952.6,3695.28 3962.44,3760 6210.47,3805 6210.47,3885 2720.47,3890 3930,3969.53 4910,3970
  other v2: 2495,2090 6180,2090 2495,4230 6180,4230
  other v3: 5644.31,2527.26 5683.69,2527.26 5644.31,2566.63 5683.69,2566.63
LATCH_CLK: J5.1 U1.5 U4.12 U6.12 U8.12 | length 8359.4
  Top Layer w6: v1(2670,3755) 2655,3770 2655,3870.23 2714.77,3930 2950,3930 3005,3985 3005,4240 3062.86,4297.86 4922.3,4297.86 5035.16,4185 J5.1 5090,4165 5090,4130 5105,4115 5280,4115 5345,4050 5345,3930.47 5332.8,3918.26 U6.12 5332.8,3792.2 5385,3740 5455,3740 5585,3610 5585,2792.15 5519.45,2726.6 5412.22,2726.6 5397.26,2711.64 5397.26,2537.74 5475,2460 5585,2460 5604.94,2479.94 U1.5 ; v1(2726.1,3726.1) 2726.65,3726.65 2754.8,3726.65 U4.12@2755.35,3726.1 ; U4.12 2756.46,3727.2 2751.58,3722.33 2749.63,3722.33 2731.55,3704.25 2714.58,3704.25 2700,3689.66 2700,3640 2635,3575 2475,3575 2450,3550 2450,2755 2495,2710 2690,2710 2907,2493 v1(3810,2493) ; v1(3940,2570) 3952.8,2582.8 U8.12
  Bottom Layer w6: v1(2670,3755) 2698.9,3726.1 v1(2726.1,3726.1) ; v1(3810,2493) 3863,2493 v1(3940,2570)
NetD1_1: D1.1 R1.2 | length 82.9
  Top Layer w6: R1.2 D1.1
NetD2_1: D2.1 R39.2 | length 92.3
  Top Layer w6: R39.2 3950,3409.06 3961.5,3397.55 3961.5,3393.61 3986.06,3369.06 D2.1
NetD3_1: D3.1 R40.2 | length 408.8
  Top Layer w6: D3.1 3990,3140 4050,3200 4050,3426.38 4033.94,3442.44 R40.2
NetD4_1: D4.1 R41.2 | length 70.6
  Top Layer w6: R41.2 5259.06,2718.5 D4.1
NetD5_1: D5.1 R42.2 | length 70.6
  Top Layer w6: R42.2 5257.56,2558.5 D5.1
NetJ7_A5: J7.A5 R12.2 | length 61.4
  Bottom Layer w6: J7.A5 2641.73,2405.39 2702.05,2405.39 v1(2702.44,2405)
NetJ7_B5: J7.B5 R19.2 | length 61.6
  Bottom Layer w6: J7.B5 2641.89,2524.45 2701.89,2524.45 v1(2702.44,2525)
NetMT1_A: MT1.A R4.1 R7.1 | length 202.2
  Top Layer w6: MT1.A 6066.39,3810.46 6066.39,3763.61 6085,3745 R4.1 R7.1
NetMT1_B: MT1.B R3.1 R9.1 | length 181.5
  Top Layer w6: MT1.B 6065.28,3994.72 6115,3945 R9.1
NetQ1_3: Q1.3 R39.1 R40.1 R41.1 R42.1 | length 1985.7
  Top Layer w6: Q1.3 3990,3595.87 3950,3555.87 R39.1 v1(4030,3497.56) ; v1(4105,3420) 4150,3375 v1(4255,3375) ; v1(4405,3375) 4585,3375 v1(5060,2900) ; v1(5122,2860) 5120,2858 5120,2765 5165,2720 R41.1 R42.1
  Bottom Layer w6: v1@4030,3495 v1(4105,3420) ; v1(4255,3375) v1(4405,3375) ; v1(5060,2900) 5064.21,2895.79 5074.21,2895.79 5097.62,2872.38 5103.66,2872.38 5116.05,2860 v1(5122,2860)
NetR2_2: R2.2 U1.19 | length 188.1
  Top Layer w6: U1.19 5648.25,2656.18 5729.74,2737.66 5740.66,2737.66 R2.2
NetR11_1: R11.1 SEG1.10 | length 115
  Top Layer w6: SEG1.10 R11.1
NetR11_2: R11.2 U3.14 | length 586.8
  Top Layer w6: U3.14 2755,3365 2755,3440 2780,3465 2840,3465 2897,3522 2897,3687 2940,3730 R11.2
NetR13_1: R13.1 SEG1.9 | length 113.9
  Top Layer w6: SEG1.9 R13.1
NetR13_2: R13.2 U3.15 | length 551.2
  Top Layer w6: U3.15 2950,3410 2990,3450 2990,3750 3001.1,3761.1 R13.2
NetR14_1: R14.1 SEG1.1 | length 115
  Top Layer w6: R14.1 SEG1.1
NetR14_2: R14.2 U3.9 | length 306.1
  Bottom Layer w6: U3.9 2810,2687.8 v1(2940,2557.8)
NetR15_1: R15.1 SEG1.2 | length 115
  Top Layer w6: R15.1 SEG1.2
NetR15_2: R15.2 U3.10 | length 503.1
  Bottom Layer w6: U3.10 2905,2910 2990,2825 2990,2607.8 v1(3040,2557.8)
NetR16_1: R16.1 SEG1.4 | length 115
  Top Layer w6: R16.1 SEG1.4
NetR16_2: R16.2 U3.11 | length 762.1
  Bottom Layer w6: U3.11 3035,3010 3190,2855 3190,2607.8 v1(3240,2557.8)
NetR17_1: R17.1 SEG1.6 | length 115
  Top Layer w6: SEG1.6 R17.1
NetR17_2: R17.2 U3.12 | length 871.7
  Bottom Layer w6: U3.12 2820.15,3120.15 2820.15,3134.51 2823.74,3138.1 2823.74,3138.74 3340,3655 v1(3340,3762.2)
NetR18_1: R18.1 SEG1.7 | length 115
  Top Layer w6: SEG1.7 R18.1
NetR18_2: R18.2 U3.13 | length 730.3
  Bottom Layer w6: U3.13 2810,3250 3240,3680 v1(3240,3762.2)
NetR21_1: R21.1 SEG2.10 | length 115
  Top Layer w6: SEG2.10 R21.1
NetR21_2: R21.2 U5.14 | length 462.7
  Top Layer w6: R21.2 3450,3813.19 3407.31,3855.88 3407.31,3932.31 3435,3960 3600,3960 U5.14
NetR22_1: R22.1 SEG2.9 | length 115
  Top Layer w6: SEG2.9 R22.1
NetR22_2: R22.2 U5.15 | length 809.5
  Top Layer w6: R22.2 3539.17,3762.2 3486.97,3710 3415,3710 3391.62,3733.38 3391.62,3941.62 3440,3990 3670,3990 U5.15
NetR23_1: R23.1 SEG2.1 | length 115
  Top Layer w6: R23.1 SEG2.1
NetR23_2: R23.2 U5.9 | length 1598.7
  Bottom Layer w6: U5.9 3150,3860 3205,3805 3350,3805 3495,3660 3495,2714.37 3450,2669.37 v1(3450,2557.8)
NetR24_1: R24.1 SEG2.2 | length 115
  Top Layer w6: R24.1 SEG2.2
NetR24_2: R24.2 U5.10 | length 1546.8
  Bottom Layer w6: U5.10 3250,3850 3270,3830 3390,3830 3515,3705 3515,2592.8 v1(3550,2557.8)
NetR25_1: R25.1 SEG2.4 | length 137.9
  Top Layer w6: R25.1 3720.83,2670 3750,2699.17 SEG2.4
NetR25_2: R25.2 U5.11 | length 1565.8
  Bottom Layer w6: U5.11 3435,3825 3545,3825 3600,3770 3600,2667.8 v1(3710,2557.8)
NetR26_1: R26.1 SEG2.6 | length 115
  Top Layer w6: SEG2.6 R26.1
NetR26_2: R26.2 U5.12 | length 504.5
  Top Layer w6: U5.12 3517.58,3842.42 3567.58,3842.42 3700,3710 3786.97,3710 3839.17,3762.2 R26.2
NetR27_1: R27.1 SEG2.7 | length 115
  Top Layer w6: SEG2.7 R27.1
NetR27_2: R27.2 U5.13 | length 261.2
  Top Layer w6: U5.13 3697.8,3762.2 R27.2
NetR29_1: R29.1 SEG3.10 | length 115
  Top Layer w6: SEG3.10 R29.1
NetR29_2: R29.2 U7.14 | length 586.3
  Bottom Layer w6: v1(4130,3762.2) 4130,3805 4165,3840 4560,3840 U7.14
NetR30_1: R30.1 SEG3.9 | length 115
  Top Layer w6: SEG3.9 R30.1
NetR30_2: R30.2 U7.15 | length 561.2
  Bottom Layer w6: v1(4230,3762.2) 4287.8,3820 4640,3820 U7.15
NetR31_1: R31.1 SEG3.1 | length 115
  Top Layer w6: R31.1 SEG3.1
NetR31_2: R31.2 U7.9 | length 1405.3
  Top Layer w6: R31.2 4111.35,2576.45 4098.55,2576.45 4085,2590 4085,3152.5 4075,3162.5 4075,3855 U7.9
NetR32_1: R32.1 SEG3.2 | length 115
  Top Layer w6: R32.1 SEG3.2
NetR32_2: R32.2 U7.10 | length 1399.2
  Top Layer w6: R32.2 4240.83,2557.8 4279.1,2596.07 4279.1,3860.9 U7.10
NetR33_1: R33.1 SEG3.4 | length 115
  Top Layer w6: R33.1 SEG3.4
NetR33_2: R33.2 U7.11 | length 1400
  Top Layer w6: U7.11 4380,3860 4380,2654.55 4400.52,2634.03 4400.52,2576.45 4419.17,2557.8 R33.2
NetR34_1: R34.1 SEG3.6 | length 115
  Top Layer w6: SEG3.6 R34.1
NetR34_2: R34.2 U7.12 | length 410.4
  Top Layer w6: U7.12 4438.53,3918.53 4438.53,3948.53 4465,3975 4550,3975 4580,3945 4580,3860 4530,3810 R34.2
NetR35_1: R35.1 SEG3.7 | length 115
  Top Layer w6: SEG3.7 R35.1
NetR35_2: R35.2 U7.13 | length 195.6
  Top Layer w6: R35.2 4440.83,3762.2 4530,3851.38 U7.13
NetR37_1: R37.1 SEG4.10 | length 115
  Top Layer w6: SEG4.10 R37.1
NetR37_2: R37.2 U9.14 | length 1017.3
  Bottom Layer w6: v1(4640,3762.2) 4641.37,3760.84 4659.16,3760.84 4960,3460 5225,3460 5375,3310 U9.14
NetR38_1: R38.1 SEG4.9 | length 115
  Top Layer w6: SEG4.9 R38.1
NetR38_2: R38.2 U9.15 | length 875.9
  Bottom Layer w6: v1(4740,3762.2) 4947.2,3555 5215,3555 5360,3410 U9.15
NetR43_1: R43.1 SEG4.1 | length 115
  Top Layer w6: R43.1 SEG4.1
NetR43_2: R43.2 U9.9 | length 934.5
  Bottom Layer w6: v1(4640,2557.8) 4812.2,2730 5390,2730 U9.9
NetR44_1: R44.1 SEG4.2 | length 115
  Top Layer w6: R44.1 SEG4.2
NetR44_2: R44.2 U9.10 | length 1018.6
  Bottom Layer w6: v1(4740,2557.8) 4887.8,2557.8 5025,2695 5435,2695 5515,2775 5515,2865 U9.10
NetR45_1: R45.1 SEG4.4 | length 115
  Top Layer w6: R45.1 SEG4.4
NetR45_2: R45.2 U9.11 | length 961.6
  Bottom Layer w6: v1(4940,2557.8) 4940,2585 5035,2680 5445,2680 5530,2765 5530,2950 U9.11
NetR46_1: R46.1 SEG4.6 | length 115
  Top Layer w6: SEG4.6 R46.1
NetR46_2: R46.2 U9.12 | length 1039.8
  Bottom Layer w6: v1(5040,3762.2) 5207.2,3595 5480,3595 5530,3545 5530,3170 U9.12
NetR47_1: R47.1 SEG4.7 | length 115
  Top Layer w6: SEG4.7 R47.1
NetR47_2: R47.2 U9.13 | length 1006.9
  Bottom Layer w6: v1(4940,3762.2) 4997.8,3762.2 5185,3575 5465,3575 5515,3525 5515,3255 U9.13
NetU4_9: U4.9 U6.14 | length 3244.6
  Top Layer w6: v1(2875,3665) 2875,3717.62 2895.72,3738.33 2895.72,3785 3060,3949.28 3060,4200 3118.53,4258.53 3915,4258.53 3924.92,4268.45 4110.08,4268.45 4120,4258.53 4861.47,4258.53 4915,4205 4915,4130 4945,4100 5055,4100 5085,4070 5085,3990 5145,3930 5263.96,3930 5281.61,3912.35 U6.14
  Bottom Layer w6: v1(2775.16,3646.5) 2856.5,3646.5 v1(2875,3665)
NetU6_9: U6.9 U8.14 | length 3299.1
  Top Layer w6: v1(3775,2455) 3775,2380 3835,2320 4085,2320 4215,2450 5015,2450 5100,2535 5100,3610 5220,3730 v1(5325,3730) ; v1(3793.09,2536.2) 3799.04,2536.2 3849.85,2587 3897,2587 3901.61,2591.61 U8.14 ; v1(5395,3800) 5413.5,3818.5 U6.9
  Bottom Layer w6: v1(3775,2455) 3775,2517.52 3793.09,2535.61 v1(3793.09,2536.2) ; v1(5325,3730) v1(5395,3800)
OE: R20.2 R28.2 R36.2 TP2.TP U1.7 U4.13 U6.13 U8.13 | length 8268.5
  Top Layer w6: R36.2 3927.2,2709.65 U8.13 3927.2,2588.32 3846.14,2507.25 3846.14,2490.7 3826.44,2471 3790.11,2471 3783.11,2478 2887,2478 2675,2690 2480,2690 2430,2740 2430,3565 2455,3590 2625,3590 2685.62,3650.62 2685.62,3700.66 2703,3718.04 2703,3737.35 2718.44,3752.8 U4.13 2857.27,3752.8 2870,3765.53 R20.2 2873.94,3792.44 2884.72,3803.22 2884.72,3807.16 3035,3957.44 3035,4220 3094.45,4279.45 4870.55,4279.45 4935,4215 4935,4140 4960,4115 5065,4115 TP2.TP 5237.56,3942.44 R28.2 5307.2,3939.65 U6.13 5307.2,3782.8 5370,3720 5450,3720 5555,3615 5555,2780 5515,2740 5405,2740 5385,2720 5385,2510 v1(5450,2445) ; v1(5648.25,2457.26) U1.7
  Bottom Layer w6: v1(5450,2445) 5490,2405 5600,2405 5648.25,2453.25 v1(5648.25,2457.26)
ONOFF: MT1.1 U1.17 | length 1282.6
  Top Layer w6: U1.17 5679.75,2649.75 v1(5680,2650)
  Bottom Layer w6: MT1.1 5570,3735.98 5570,2820 5680,2710 v1(5680,2650)
PB2//TX: P2.2 U1.12 | length 243.2
  Top Layer w6: U1.12 5771.2,2531.2 5800,2560 5885,2560 P2.2
PB3//RX: P2.1 U1.11 | length 112.8
  Top Layer w6: U1.11 5829.55,2515.45 P2.1
PMIndicator: D5.2 U8.3 | length 1343.9
  Top Layer w6: U8.3 3901.61,2431.61 3945,2475 5000,2475 5035,2510 5035,2535 v1(5060,2560)
  Bottom Layer w6: v1(5060,2560) v1(5140.94,2560)
Q[0]: U3.7 U4.15 | length 1090.7
  Top Layer w6: v1(2725,3805) 2725.51,3804.49 2774.65,3804.49 U4.15
  Bottom Layer w6: U3.7 2645,3045 2645,3565 2755,3675 2755,3745 2740,3760 2715,3760 2705,3770 2705,3785 v1(2725,3805)
Q[1]: U3.1 U4.1 | length 376.6
  Bottom Layer w6: U3.1 2490,3530 2490,3815 2510,3835 v1@2545,3835
  other v1: 2544.84,3833.5
Q[2]: U3.2 U4.2 | length 544.6
  Top Layer w6: U4.2 2591.02,3803.98 v1(2600,3795)
  Bottom Layer w6: U3.2 2590,3410 2620,3440 2620,3775 v1(2600,3795)
Q[3]: U3.6 U4.3 | length 954.8
  Top Layer w6: U4.3 2582.73,3778.39 2612,3749.11 2612,3657 v1(2595,3640)
  Bottom Layer w6: U3.6 2460,3060 2460,3435 2480,3455 2570,3455 2595,3480 v1(2595,3640)
Q[4]: U4.4 U5.7 | length 1082.8
  Top Layer w6: U4.4 2497.2,3752.8 2480,3770 2480,3870 2515,3905 v1(2555,3905)
  Bottom Layer w6: v1(2555,3905) 2559.51,3905 2569.51,3915 2955,3915 U5.7
Q[5]: U4.5 U5.1 | length 1878.4
  Top Layer w6: U4.5 2577.2,3727.2 v1(2590,3740) ; U5.1 3920,4210 v1(3945,4235)
  Bottom Layer w6: v1(2590,3740) 2590,3766.98 2578,3778.98 2578,3804.11 2590.89,3817 2618,3817 2620,3815 2700,3815 2715,3830 2740,3830 2765.5,3855.5 2779.5,3855.5 2780,3855 2837.5,3855 2852.5,3870 2980,3870 3125,4015 3325,4015 3505,4195 3505,4259.03 3545.97,4300 3905,4300 3945,4260 v1(3945,4235)
Q[6]: U4.6 U5.2 | length 2210.1
  Top Layer w6: U4.6 2546.54,3703.31 2588.31,3703.31 v1(2590,3705) ; U5.2 3795,4165 3950,4165 3985,4200 v1(3985,4235)
  Bottom Layer w6: v1(2590,3705) 2560,3735 2560,3805 2590,3835 2704.44,3835 2754.44,3885 2960,3885 3130,4055 3285,4055 3402.47,4172.47 3402.47,4259.56 3462.92,4320 3940,4320 3985,4275 v1(3985,4235)
Q[7]: U4.7 U5.6 | length 1377
  Top Layer w6: v1(2480,3915) 2445,3880 2445,3700 2468.98,3676.02 U4.7
  Bottom Layer w6: v1(2480,3915) 2830,4265 3295,4265 U5.6
Q[8]: U6.15 U7.7 | length 1192.8
  Top Layer w6: v1(4700,4090) 4890,4090 v1(4915,4065) ; v1(5160,3905) 5190,3905 5200,3915 5250,3915 5256.02,3908.98 U6.15
  Bottom Layer w6: U7.7 4350,4090 v1(4700,4090) ; v1(4915,4065) 5040,3940 5125,3940 v1(5160,3905)
Q[9]: U6.1 U7.1 | length 729.4
  Top Layer w6: v1(5010,3885) v1(5010,3935)
  Bottom Layer w6: U7.1 4830,4115 v1(5010,3935) ; v1(5010,3885) 5010,3861.34 v1(5226.5,3644.84)
Q[10]: U6.2 U7.2 | length 891.4
  Top Layer w6: v1(4950,3935) 4950,3885 4980,3855 5075,3855 v1(5094.92,3835.08) ; v1(5255,3705) 5255.51,3704.49 5255.51,3645.35 U6.2
  Bottom Layer w6: U7.2 4740.15,4199.85 4740.15,4179.85 4945.79,3974.21 4945.79,3939.21 v1(4950,3935) ; v1(5094.92,3835.08) 5184.92,3835.08 5252.24,3767.76 5252.24,3707.76 v1(5255,3705)
Q[11]: U6.3 U7.6 | length 1317.4
  Top Layer w6: v1(4650,4135) 4885,4135 4950,4070 4950,4035 5000,3985 5010,3985 5050,3945 v1(5050,3885) ; U6.3 5281.61,3681.61 v1(5290,3690)
  Bottom Layer w6: U7.6 4405,4135 v1(4650,4135) ; v1(5050,3885) 5050,3848.89 5228.89,3670 5270,3670 v1(5290,3690)
Q[12]: U6.4 U9.7 | length 916.3
  Top Layer w6: U9.7 5115,2965 5115,3545 5140,3570 5275,3570 5307.2,3602.2 U6.4
Q[13]: U6.5 U9.1 | length 255
  Top Layer w6: U9.1 5260,3510 5332.8,3582.8 U6.5
Q[14]: U6.6 U9.2 | length 339.2
  Top Layer w6: U9.2 5215,3410 5358.39,3553.39 U6.6
Q[15]: U6.7 U9.6 | length 758.6
  Top Layer w6: U9.6 5230,3010 5383.98,3163.98 U6.7
SCL: R5.1 U1.14 U2.3 | length 567.8
  Top Layer w6: U1.14 5747.69,2562.69 5785,2600 5970,2600 5986.56,2583.44 R5.1 6027.94,2583.44 6054.5,2610 6155,2610 6191.72,2646.72 U2.3
SDA: R6.1 U1.13 U2.4 | length 645
  Top Layer w6: U1.13 5761.94,2546.94 5795,2580 5960,2580 5995,2545 6065,2545 6079,2559 R6.1 6173.44,2583.44 6227.15,2637.15 U2.4
SET: S2.1 U1.15 | length 850
  Top Layer w6: U1.15 5723.06,2618.06 5825,2720 5930,2720 5950,2740 5950,3199.37 S2.1
UPDI: P1.2 R2.1 | length 103.2
  Top Layer w6: R2.1 5863.58,2746 5883.58,2766 P1.2
VBACKUP: R8.2 U2.6 | length 116.5
  Top Layer w6: R8.2 6191.44,2744.9 U2.6
WAKE: S1.1 U1.16 | length 451.5
  Top Layer w6: U1.16 5695.95,2606.46 5695.95,2625.95 5722,2652 5722,2672 v1(5725,2675) ; v1(5695.5,2750.5) 5695.5,2780.5 5816.42,2901.42 S1.1
  Bottom Layer w6: v1(5695.5,2750.5) 5695.5,2729.5 5725,2700 v1(5725,2675)
pads on no net: J7. J7.A6 J7.A7 J7.A8 J7.B6 J7.B7 J7.B8 S1.2 S1.3 S2.2 S2.3 U1.8 U1.18 U2.1 U2.2 U8.4 U8.5 U8.6 U8.7 U8.9

## Polygon pours and split planes (outlines as drawn)
GND on Bottom Layer "GND_L02_P000" (solid, pour order 0): 2340.01,4390 6335,4390 6335,1930 2335,1930

## Silkscreen, mask and mechanical layers (free items; w line width, h text height)
Top Overlay:
  text "SR CLK" at 5279.19,4241 h25
  text "LATCH CLK" at 4960.7,4240.01 h25
  text "DIN" at 2563.76,4031 h25
  text "GND" at 2856.68,4024.01 h25
  text "GND" at 4976.68,3969.01 h25
  text "OE" at 5149.17,3934.01 h25
  text "BRIGHTNESS" at 5603.8,3572.01 h35
  text "SET TIME" at 5948,3322.51 h35
  text "INCREMENT" at 5948,2972.51 h35
  text "BLTIN" at 5670,2673.5 h25
  text "UPDI" at 5847.35,2670.01 h25
  text "GND" at 5975.68,2670.01 h25
  text "AM" at 5318,2632.51 h35
  text "RX" at 5813.17,2582 h25
  text "TX" at 5913.17,2582 h25
  text "PM" at 5318,2542.51 h35
  text "5V0" at 6201.68,2439.01 h25
  text "GND" at 6051.68,2319.01 h25
  text "BL PWM" at 5259.19,2314.01 h25
  text "ENCODERB" at 5524.2,2314.01 h25
  text "ENCODERA" at 5759.2,2314.01 h25
  text "Designed by:" at 3823,2178.34 h35
  text "https://nicholasniles.com/" at 5058,2088.34 h35
  text "Digital Clock - Nicholas Niles" at 2766,2071.67 h70
Mechanical 1:
  the board outline again, w10